# Altium PCB 02_buck_converter.PcbDoc
Units mm, origin at the board's own origin, x right, y up, seen from the top; angles counter-clockwise.
Board outline 42 x 25 mm, 2 copper layers (Top Layer, Bottom Layer), stack 1.571 mm thick; 7 components, 5 nets, 22 pads, 0 vias.
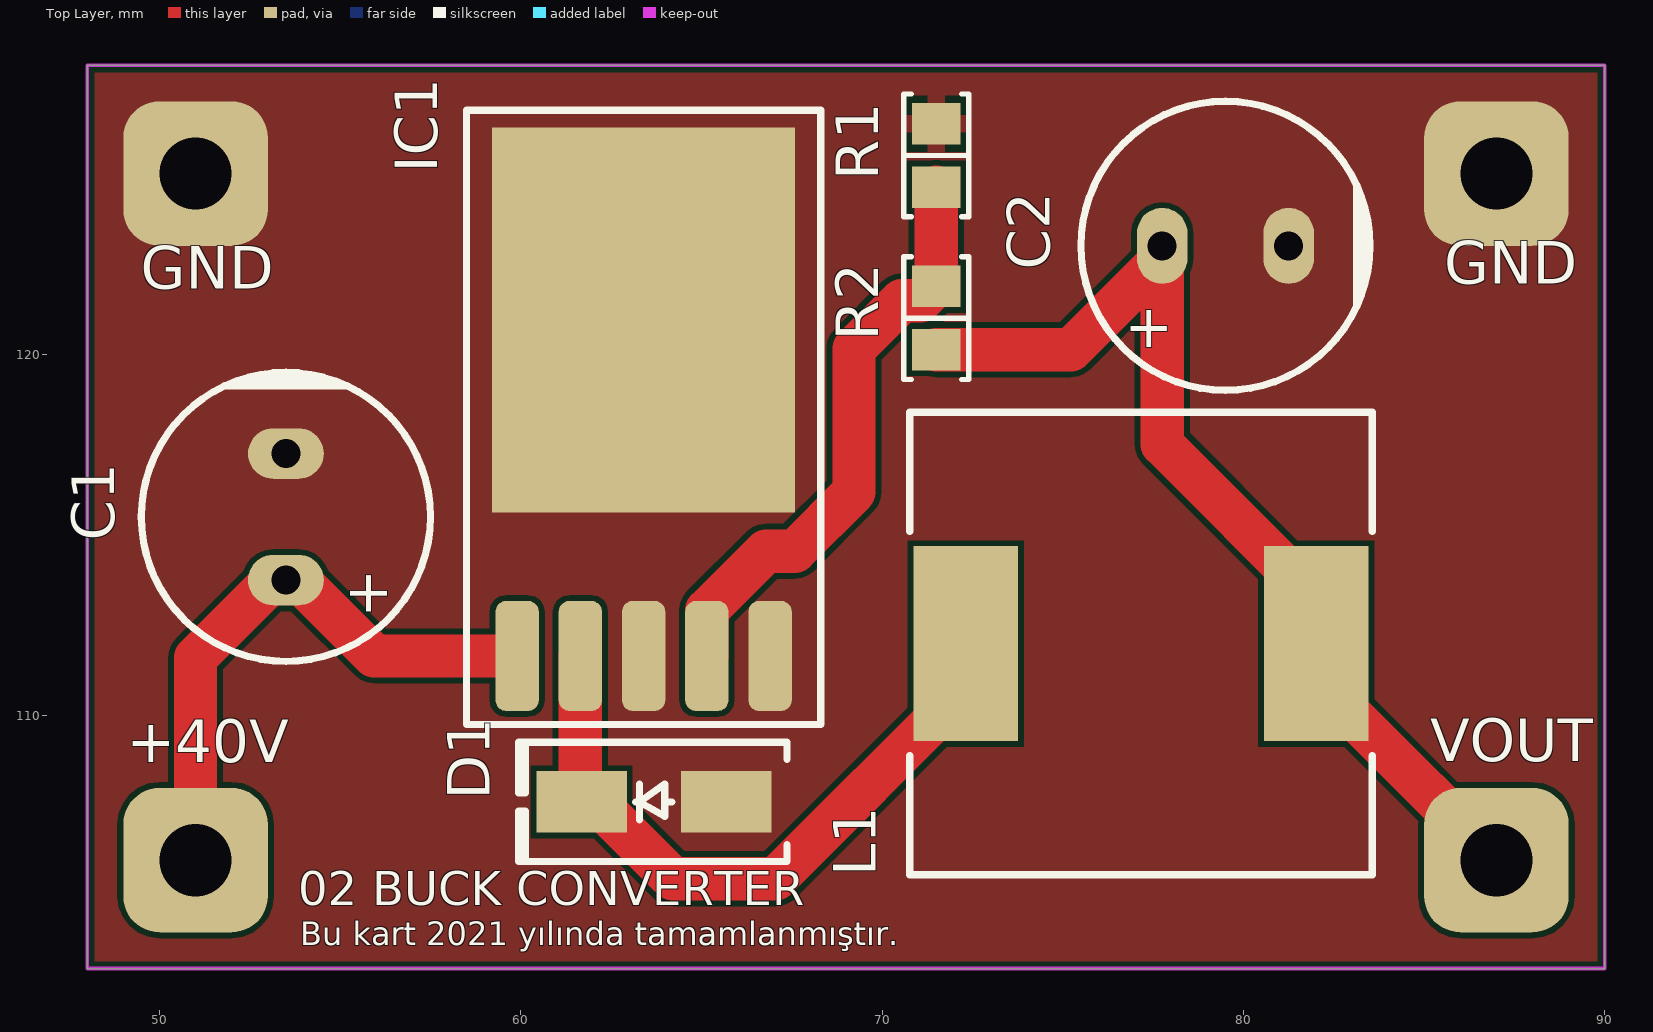
[diagram p0: Top Layer view]
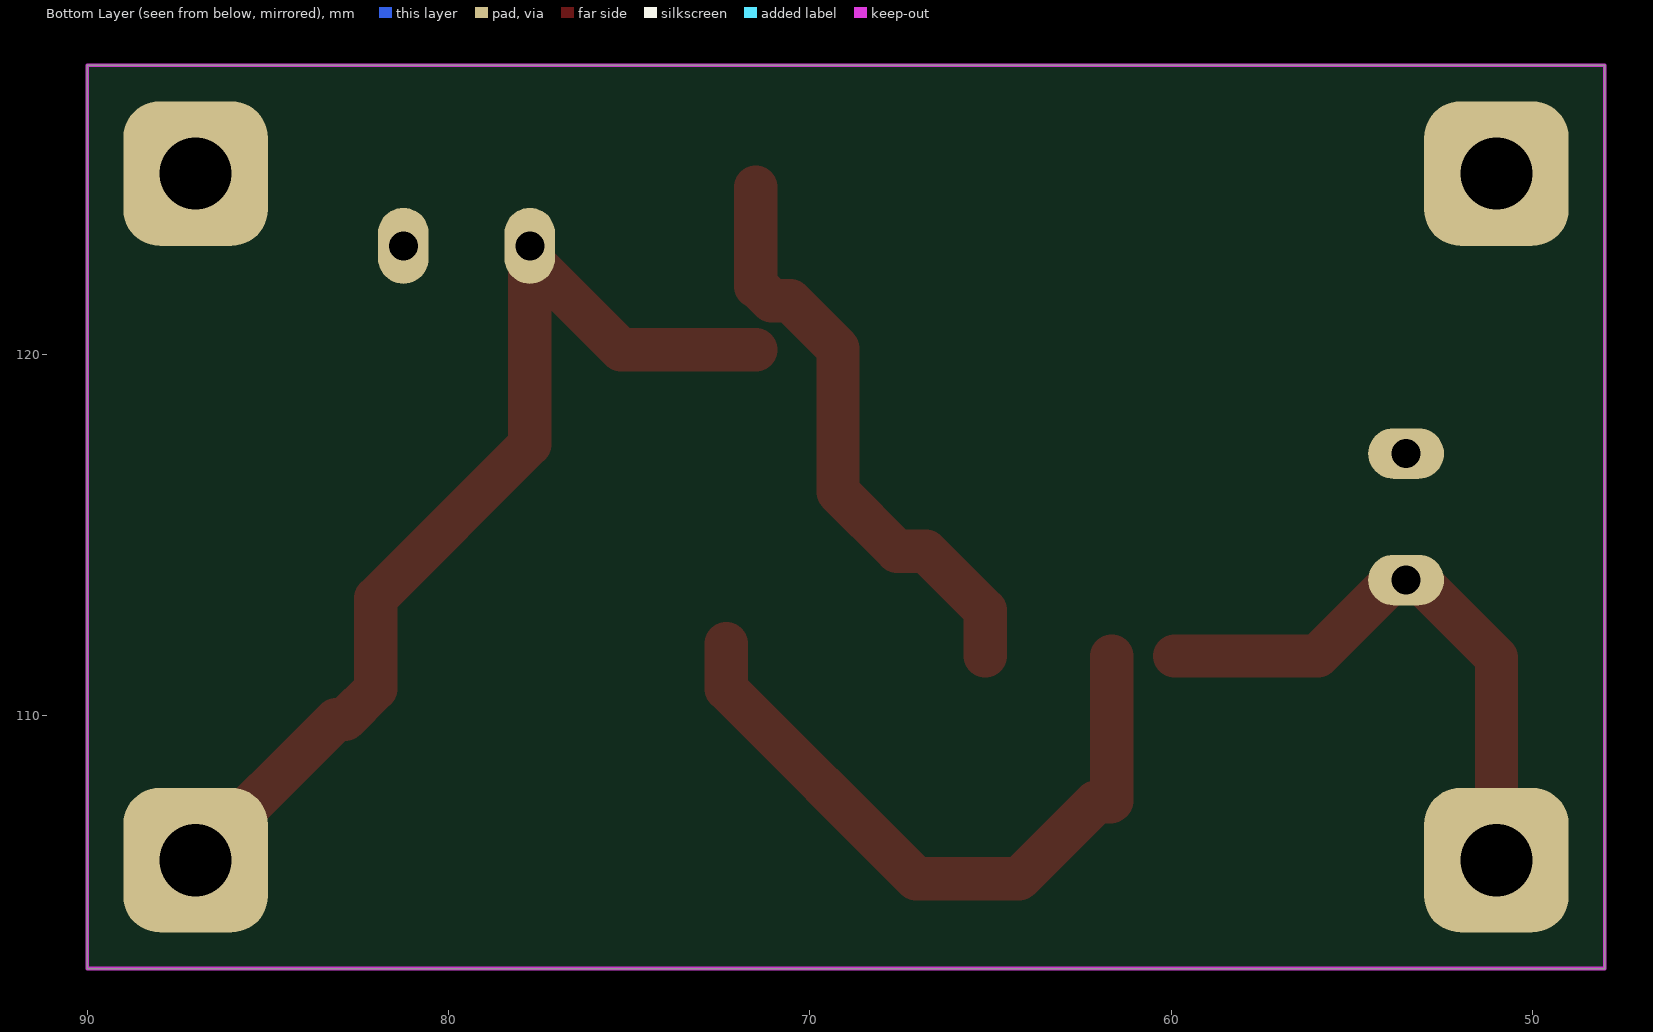
[diagram p1: Bottom Layer view, seen from below]
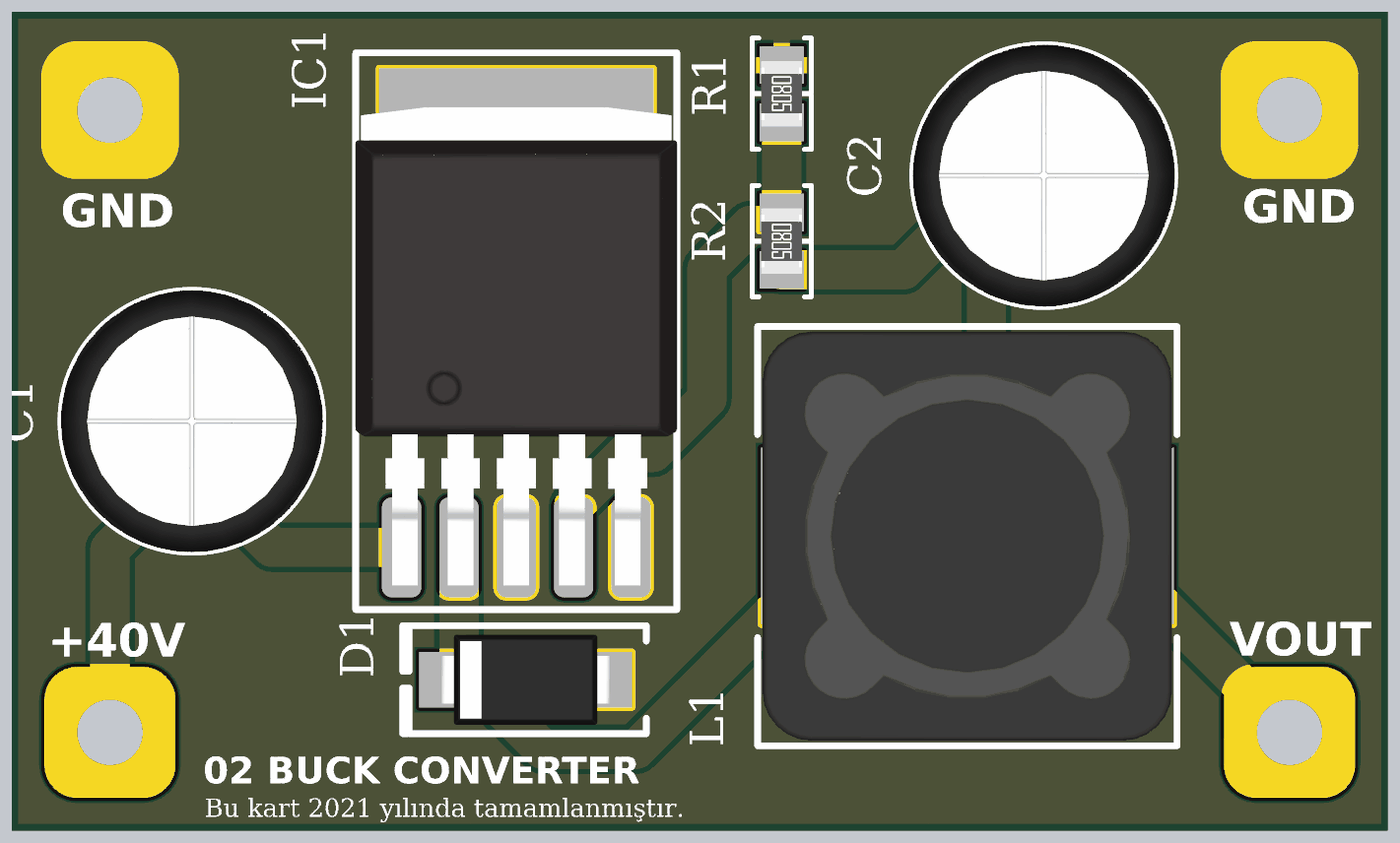
[diagram p2: 3D render of the assembled board from above, using the file's embedded part models]

## Layer stack, top to bottom
Top Solder: solder mask 0.0102, Solder Resist, Dk 3.5
Top Layer: signal copper 0.0356
Dielectric 1: dielectric 1.5, FR-4, Dk 4.8
Bottom Layer: signal copper 0.0356
Bottom Solder: solder mask 0.0102, Solder Resist, Dk 3.5

## Board outline
48,103 48,128 90,128 90,103

## Design rules (kind name [scope] priority, off if disabled: settings)
Clearance [All] p1: gap=0.152 ignorepadtopadclearanceinfootprint=FALSE
HoleSize [All] p1: absolutevalues=TRUE maxlimit=5 minlimit=0.025 maxpercent=80.000 minpercent=20.000
PolygonConnect [All] p1: thpad.connectstyle=Direct thpad.reliefconductorwidth=0.254 thpad.reliefentries=4 thpad.polygonreliefangle="90 Angle" thpad.airgapwidth=0.254 smdpad.connectstyle=Relief smdpad.reliefconductorwidth=0.5 smdpad.reliefentries=4 smdpad.polygonreliefangle="90 Angle" smdpad.airgapwidth=0.2 via.connectstyle=Direct via.reliefconductorwidth=0.254 via.reliefentries=4 via.polygonreliefangle="90 Angle" via.airgapwidth=0.254
RoutingVias [All] p1: holewidth=0.711 width=1.27 viastyle="Through Hole" minholewidth=0.711 minwidth=1.27 maxholewidth=0.711 maxwidth=1.27
SilkToSilkClearance [All] p1: silktosilkclearance=0
SilkToSolderMaskClearance [IsPad] p1: minsilkscreentomaskgap=0 clearancetoexposedcopper=TRUE
SolderMaskExpansion [All] p1: expansion=0.102 istentingtop=FALSE
Width [All] p1: maxlimit=2 minlimit=0.152 preferedwidth=0.5
27 further rules are at their usual default settings.

## Classes and differential pairs
component class 01_buck_converter: C1 C2 D1 IC1 L1 R1

## Components (designator, comment, footprint, x,y, rotation, side; value= is the part's Value field where it differs from the comment)
C1 "100µF" "CAP TH ALUM ELEC D8.00mm S3.50mm H12.50mm" 53.5,115.5 r270 top
C2 "220µF" "CAP TH ALUM ELEC D8.00mm S3.50mm H12.50mm" 79.5,123 r180 top
D1 "ACDBA560-HF" "DO214AC SMA" 63.685,107.61 r180 top
IC1 "LM2596" D2PAK 63.5,119.5 r0 top
L1 "33µH" "BOURNS SRR1280" 77.165,111.993 r0 top
R1 "4.7 kOhms" "RES 0805_2012" 71.5,125.5 r270 top
R2 "10 kOhms" "RES 0805_2012" 71.5,121 r270 top

## Footprints (in the part's own frame and the unit in brackets; to place one, negate y for a bottom-side part, rotate by r counter-clockwise, add the part's x,y. Pads: shape width x height; smd on the part's side, far side on the other; paste and mask are expansions set on the pad)
"BOURNS SRR1280" [mm] "Precision Wire Wound Inductor, 2-Leads, Body 12.50x12.50mm, IPC Medium Density"
  rect 2.9x5.4 smd: 1(-4.85,0) 2(4.85,0)
  silkscreen extent -6.4,-6.4 6.4,6.4, body extent -6.25,-6.25 6.25,6.25, height 7.9
"CAP TH ALUM ELEC D8.00mm S3.50mm H12.50mm" [mm] "8mm Diameter 3.5mm Lead Spacing Aluminum Electrolytic Capacitors Radial, Can"
  oval 1.4x2.1 hole 0.8: 1(1.75,0) 2(-1.75,0)
  silkscreen extent -4,-4 4,4, body extent -4.01,-4 4,4, height 12.5
D2PAK [mm]
  rrect50% 1.2x3.05 smd: 1(-3.6,-7.85) 2(-1.85,-7.85) 3(-0.1,-7.85) 4(1.65,-7.85) 5(3.4,-7.85)
  rect 8.38x10.66 smd: 3(-0.1,1.45)
  silkscreen extent -5,-9.75 4.8,7.25, body extent -5.01,-9.01 4.81,5.59, height 4.22
"DO214AC SMA" [mm] "Molded Diode, 2-Leads, Body 4.30x2.60mm, IPC Medium Density"
  rect 2.5x1.7 smd: 1(-2,0) 2(2,0)
  silkscreen extent -3.68,-1.65 3.75,1.65, body extent -2.6,-1.37 2.6,1.37, height 2.4
"RES 0805_2012" [mm] "Chip Resistor, 2-Leads, Body 2.00x1.25mm, IPC Medium Density"
  rect 1.15x1.35 smd: 1(-0.875,0) 2(0.875,0)
  silkscreen extent -1.7,-0.9 1.7,0.9, body extent -1,-0.62 1,0.63, height 0.6

## Part data
C1: library part ECA-1JM101, "CAP ALUM 100UF 20% 63V RADIAL", Device Package="Radial, Can", Lifetime @ Temp.="2000 Hrs @ 85°C", manufacturer="Panasonic Electronic Components", Operating Temperature="-40°C ~ 85°C", Ripple Current @ High Frequency="459mA @ 10kHz", Ripple Current @ Low Frequency="270mA @ 120Hz", Supplier Part Number 1=P5193-ND, Tolerance=±20%, Voltage - Rated=63V, Applications="General Purpose", Capacitance=100µF, componentlink1description=Datasheet, componentlink1url=//media.digikey.com/pdf/Data%20Sheets/Panasonic%20Electronic%20Components/ECA-xxM%20Series,TypeA.pdf, componentlink2description="DigiKey Link", componentlink2url=http://digikey.com/product-detail/en/panasonic-electronic-components/ECA-1JM101/P5193-ND/245052, Height - Seated (Max)="0.492\" (12.50mm)", lastupdated="7.09.2020 05:24:51", Lead Spacing="0.138\" (3.50mm)", Lifecycle Status=Active, Minimum Order=1, Mounting Type="Through Hole", Package / Case="Radial, Can", packaging=Bulk, Part Number=ECA-1JM101, Part Status=Active, partid=7225, Polarization=Polar, price=0.37, series=M, Size / Dimension="0.315\" Dia (8.00mm)", Supplier 1=DigiKey
C2: library part ECA-1VM221, "CAP ALUM 220UF 20% 35V RADIAL", Device Package="Radial, Can", Lifetime @ Temp.="2000 Hrs @ 85°C", manufacturer="Panasonic Electronic Components", Operating Temperature="-40°C ~ 85°C", Ripple Current @ High Frequency="595mA @ 10kHz", Ripple Current @ Low Frequency="350mA @ 120Hz", Supplier Part Number 1=P5166-ND, Tolerance=±20%, Voltage - Rated=35V, Applications="General Purpose", Capacitance=220µF, componentlink1description=Datasheet, componentlink1url=//media.digikey.com/pdf/Data%20Sheets/Panasonic%20Electronic%20Components/ECA-xxM%20Series,TypeA.pdf, componentlink2description="DigiKey Link", componentlink2url=http://digikey.com/product-detail/en/panasonic-electronic-components/ECA-1VM221/P5166-ND/245025, Height - Seated (Max)="0.492\" (12.50mm)", lastupdated="7.09.2020 05:24:51", Lead Spacing="0.138\" (3.50mm)", Lifecycle Status=Active, Minimum Order=1, Mounting Type="Through Hole", Package / Case="Radial, Can", packaging=Bulk, Part Number=ECA-1VM221, Part Status=Active, partid=7280, Polarization=Polar, price=0.31, series=M, Size / Dimension="0.315\" Dia (8.00mm)", Supplier 1=DigiKey
D1: "DIODE SCHOTTKY 60V 5A DO214AC", Capacitance @ Vr, F="250pF @ 4V, 1MHz", Current - Average Rectified (Io)="5A (DC)", Current - Reverse Leakage @ Vr="500µA @ 60V", manufacturer="Comchip Technology", Operating Temperature - Junction="-55°C ~ 125°C", Package / Case="DO-214AC, SMA", Supplier Device Package="DO-214AC (SMA)", Supplier Part Number 1=641-2078-1-ND, Voltage - DC Reverse (Vr) (Max)=60V, Voltage - Forward (Vf) (Max) @ If="700mV @ 5A", componentlink1description=Datasheet, componentlink1url=http://www.comchiptech.com/admin/files/product/ACDBA560-HF%20RevA201382.pdf, componentlink2description="DigiKey Link", componentlink2url=http://digikey.com/product-detail/en/comchip-technology/ACDBA560-HF/641-2078-1-ND/10131664, Diode Type=Schottky, lastupdated="2.09.2020 01:19:04", Lifecycle Status=Active, Minimum Order=1, Mounting Type="Surface Mount", packaging=TapeAndReel, Part Number=ACDBA560-HF, Part Status=Active, partid=1832, price=0.13, series="Automotive, AEC-Q101", Speed="Fast Recovery =< 500ns, > 200mA (Io)", Supplier 1=DigiKey
L1: library part SRR1280-330M, "FIXED IND 33UH 3.5A 57 MOHM SMD", Current - Saturation=3.3A, Current Rating (Amps)=3.5A, DC Resistance (DCR)="57mOhm Max", Device Package=Nonstandard, Frequency - Self Resonant=9.5MHz, manufacturer="Bourns Inc.", Operating Temperature="-40°C ~ 125°C", Q @ Freq="28 @ 2.52MHz", Supplier Part Number 1=SRR1280-330MCT-ND, Tolerance=±20%, Inductance Frequency - Test=100kHz, componentlink1description=Datasheet, componentlink1url=https://www.bourns.com/docs/Product-Datasheets/SRR1280.pdf, componentlink2description="DigiKey Link", componentlink2url=http://digikey.com/product-detail/en/bourns-inc/SRR1280-330M/SRR1280-330MCT-ND/2127440, Height - Seated (Max)="0.315\" (8.00mm)", lastupdated="2.09.2020 01:22:09", Lifecycle Status=Active, Material - Core=Ferrite, Minimum Order=1, Mounting Type="Surface Mount", Package / Case=Nonstandard, packaging=TapeAndReel, Part Number=SRR1280-330M, Part Status=Active, partid=25, price=0.65, series=SRR1280, Shielding=Shielded, Size / Dimension="0.492\" L x 0.492\" W (12.50mm x 12.50mm)", Supplier 1=DigiKey, Type=Wirewound, Inductance=33µH
R1: library part RC0805FR-074K7P, "RES SMD 4.7K OHM 1% 1/8W 0805", Device Package="0805 (2012 Metric)", manufacturer=Yageo, Operating Temperature="-55°C ~ 155°C", Power (Watts)="0.125W, 1/8W", Supplier Device Package=0805, Supplier Part Number 1=YAG1325CT-ND, Temperature Coefficient=±100ppm/°C, Tolerance=±1%, componentlink1description=Datasheet, componentlink1url=http://www.yageo.com/NewPortal/yageodocoutput?fileName=/pdf/R-Chip/PYu-RC_51_RoHS_P_0.pdf, componentlink2description="DigiKey Link", componentlink2url=http://digikey.com/product-detail/en/yageo/RC0805FR-074K7P/YAG1325CT-ND/4935438, Composition="Thick Film", Features="Moisture Resistant", Height - Seated (Max)="0.024\" (0.60mm)", lastupdated="2.09.2020 01:15:24", Lifecycle Status=Active, Minimum Order=1, Number of Terminations=2, Package / Case="0805 (2012 Metric)", packaging=TapeAndReel, Part Number=RC0805FR-074K7P, Part Status=Active, partid=27895, price=0.01, Resistance="4.7 kOhms", series="RC-P Lead Free", Size / Dimension="0.079\" L x 0.049\" W (2.00mm x 1.25mm)", Supplier 1=DigiKey
R2: library part RNCP0805FTD10K0, "RES 10K OHM 1% 1/4W 0805", Device Package="0805 (2012 Metric)", manufacturer="Stackpole Electronics Inc", Operating Temperature="-55°C ~ 155°C", Power (Watts)="0.25W, 1/4W", Supplier Device Package=0805, Supplier Part Number 1=RNCP0805FTD10K0CT-ND, Temperature Coefficient=±100ppm/°C, Tolerance=±1%, componentlink1description=Datasheet, componentlink1url=https://www.seielect.com/catalog/sei-rncp.pdf, componentlink2description="DigiKey Link", componentlink2url=http://digikey.com/product-detail/en/stackpole-electronics-inc/RNCP0805FTD10K0/RNCP0805FTD10K0CT-ND/2240601, Composition="Thin Film", Features="Anti-Sulfur, Moisture Resistant", Height - Seated (Max)="0.024\" (0.60mm)", lastupdated="2.09.2020 01:15:23", Lifecycle Status=Active, Minimum Order=1, Number of Terminations=2, Package / Case="0805 (2012 Metric)", packaging=TapeAndReel, Part Number=RNCP0805FTD10K0, Part Status=Active, partid=28021, price=0.01, Resistance="10 kOhms", series=RNCP, Size / Dimension="0.079\" L x 0.049\" W (2.00mm x 1.25mm)", Supplier 1=DigiKey

## Free pads (board coordinates)
  rrect50% 4x4 hole 2: GND(51,125) GND(87,125) VIN(51,106) VOUT(87,106)

## Nets (pads, with @x,y where several pads share a name; then routed paths per layer and width w, separated by ;. In a path a pad name is that pad's centre, name@x,y a point inside that pad or via, vN(x,y) a via of type N, cw(c..) or ccw(c..) an arc to the next point about the centre after c; other vN are vias at no path point)
+12: C2.1 L1.2 pad.VOUT R2.2 | length 28.3
  Top Layer w1.2: R2.2 75.225,120.125 C2.1@77.75,122.65 ; C2.1 C2.1@77.75,122.65 ; pad.VOUT 83.107,109.893 82.865,109.893 82.015,110.743 L1.2 82.015,113.243 77.75,117.508 C2.1@77.75,122.65
Feedback: IC1.4 R1.2 R2.1 | length 16.4
  Top Layer w1.2: IC1.4 65.15,112.913 66.787,114.55 67.583,114.55 69.22,116.187 69.22,120.158 70.539,121.477 71.052,121.477 71.45,121.875 R2.1 R1.2
GND: C1.2 C2.2 D1.1 IC1.3 IC1.5 pad.GND R1.1
NetD1_2: D1.2 IC1.2 L1.1 | length 19
  Top Layer w1.2: IC1.2 61.65,107.644 D1.2 62.085,107.61 64.213,105.481 67.053,105.481 72.315,110.743 L1.1
VCC: C1.1 IC1.1 pad.VIN | length 16.3
  Top Layer w1.2: pad.VIN 51,111.6 53.15,113.75 C1.1 53.85,113.75 55.95,111.65 IC1.1

## Polygon pours and split planes (outlines as drawn)
GND on Top Layer "NONET_L-01_P-001" (solid, remove dead copper, pour order 1): 48,128 90,128 90,103 48,103

## Keep-outs
Keep-Out Layer:
  lines w0.1: 48,103 65.219,103 73.531,103 79,103 79.688,103 90,103 90,128 79.187,128 48,128 48,104 48,103

## Other copper
Top Layer:
  region: 73.8,115
  region: 62.25,113.25

## Silkscreen, mask and mechanical layers (free items; w line width, h text height)
Top Overlay:
  text "GND" at 85.554,121.566 h2
  text "GND" at 49.49,121.43 h2
  text "VOUT" at 85.165,108.351 h2
  text "+40V" at 49.097,108.319 h2
  text "02 BUCK CONVERTER" at 53.843,104.445 h1.6
  text "Bu kart 2021 yılında tamamlanmıştır." at 53.892,103.422 h1.1

## Text inside footprints (layer, text, board x,y; h text height)
C1: Top Overlay "+" at 54.9,114.05 h2 r270
C2: Top Overlay "+" at 78.05,121.6 h2 r180